# Altium PCB TK103_Multiplexer.PcbDoc
Units mm, origin at the board's own origin, x right, y up, seen from the top; angles counter-clockwise.
Board outline 100 x 10 mm, 2 copper layers (Top Layer, Bottom Layer); 9 components, 15 nets, 71 pads, 49 vias.
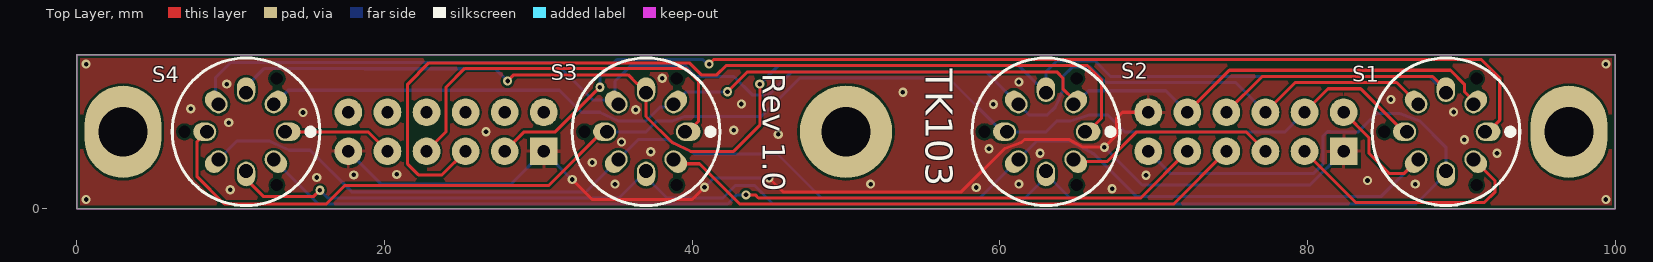
[diagram p0: Top Layer view]
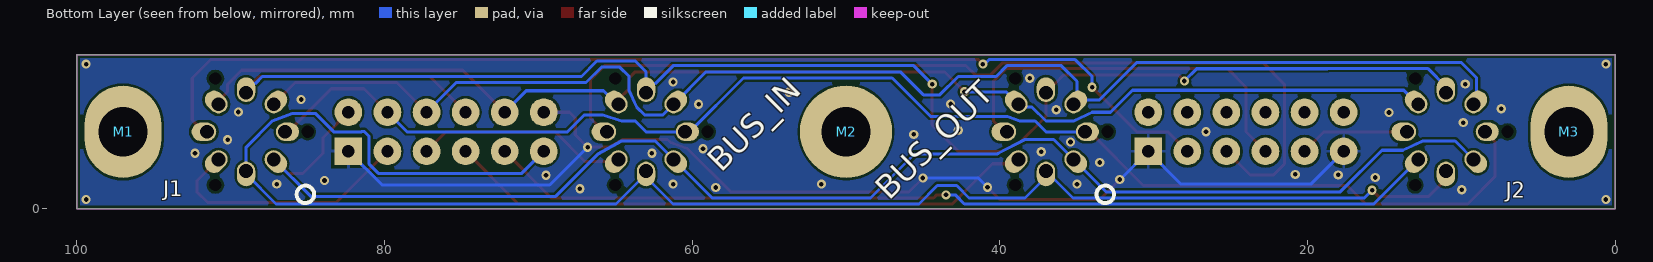
[diagram p1: Bottom Layer view, seen from below]
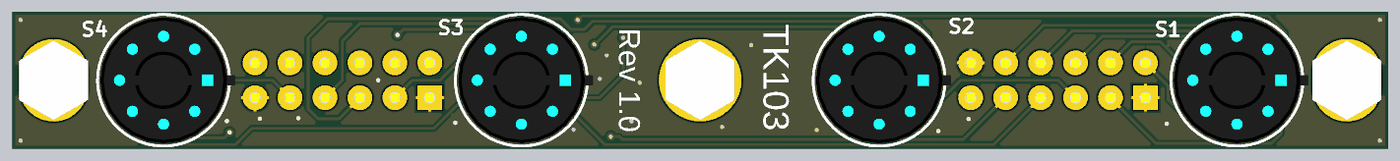
[diagram p2: 3D render of the assembled board from above, using the file's embedded part models]

## Layer stack, top to bottom
Top Solder: solder mask 0.0102, Solder Resist, Dk 3.5
Top Layer: signal copper 0.0356
Dielectric 1: dielectric 0.32, FR-4, Dk 4.8
Bottom Layer: signal copper 0.0356
Bottom Solder: solder mask 0.0102, Solder Resist, Dk 3.5

## Board outline
0,0 0,10 100,10 100,0

## Design rules (kind name [scope] priority, off if disabled: settings)
Clearance [All] p1: gap=0.16 ignorepadtopadclearanceinfootprint=FALSE except(0: Arc-Text Arc-Hole Track-Text Track-Hole SMDPad-Text SMDPad-Hole THPad-Text THPad-Hole Via-Text Via-Hole Fill-Text Fill-Hole Poly-Text Poly-Hole Region-Text Region-Hole Text-Text Text-Hole)
Height [All] p1: minheight=0 maxheight=200 prefheight=12.7
HoleSize [All] p1: absolutevalues=TRUE maxlimit=6.35 minlimit=0.3 maxpercent=80.000 minpercent=20.000
MinimumSolderMaskSliver [All] p1: minsoldermaskwidth=0.1
PlaneClearance [All] p1: clearance=1
PlaneConnect [All] p1: planeconnectstyle=Relief reliefexpansion=0.508 reliefentries=4 reliefconductorwidth=1 reliefairgap=0.254
PolygonConnect PolygonConnect_1 [IsVia] p1: connectstyle=Direct reliefconductorwidth=0.254 reliefentries=4 polygonreliefangle="90 Angle" airgapwidth=0.254
PolygonConnect [All] p2: connectstyle=Relief reliefconductorwidth=0.2 reliefentries=4 polygonreliefangle="90 Angle" airgapwidth=0.2
RoutingVias [All] p1: holewidth=0.3 width=0.6 viastyle="Through Hole" minholewidth=0.3 minwidth=0.6 maxholewidth=6.35 maxwidth=10
SilkToSolderMaskClearance [IsPad] p1: minsilkscreentomaskgap=0.178 clearancetoexposedcopper=TRUE
SolderMaskExpansion [All] p1: expansion=0.1
Width [All] p1: maxlimit=10 minlimit=0.16 preferedwidth=0.4
24 further rules are at their usual default settings.

## Components (designator, comment, footprint, x,y, rotation, side; value= is the part's Value field where it differs from the comment)
J1 "Header2x6" HDRV12W64P254_2X6_Shrouded 76,5 r90 bottom
J2 "Header2x6" HDRV12W64P254_2X6_Shrouded 24,5 r90 bottom
M1 "Avstandstykker" M3_Spacer_Inverted#1 97,5 r180 bottom
M2 "Avstandstykker" M3_Spacer_Inverted#2 50,5 r180 bottom
M3 "Avstandstykker" M3_Spacer_Inverted#1 3,5 r180 bottom
S1 "RM100772BCB" RM100772BCB 89,5 r270 top
S2 "RM100772BCB" RM100772BCB 63,5 r270 top
S3 "RM100772BCB" RM100772BCB 37,5 r270 top
S4 "RM100772BCB" RM100772BCB 11,5 r270 top

## Footprints (in the part's own frame and the unit in brackets; to place one, negate y for a bottom-side part, rotate by r counter-clockwise, add the part's x,y. Pads: shape width x height; smd on the part's side, far side on the other; paste and mask are expansions set on the pad)
HDRV12W64P254_2X6_Shrouded [mm] "Header 2x6 Shrouded"
  rect 1.8x1.8 hole 0.8: 1(-1.27,6.35)
  round 1.8 hole 0.8: 2(1.27,6.35) 3(-1.27,3.81) 4(1.27,3.81) 5(-1.27,1.27) 6(1.27,1.27) 7(-1.27,-1.27) 8(1.27,-1.27) 9(-1.27,-3.81) 10(1.27,-3.81) 11(-1.27,-6.35) 12(1.27,-6.35)
  silkscreen extent -4.63,8.58 -3.5,9.71, body extent -4.45,-9.53 4.83,9.52, height 8.89
M3_Spacer_Inverted#1 [mm]
  oval 5x6 hole 3.2 unplated: 0(0,0)
  body extent -2.5,-2.89 2.5,2.89, height 7.5
M3_Spacer_Inverted#2 [mm]
  round 6 hole 3.2 unplated: 0(0,0)
  body extent -2.5,-2.89 2.5,2.89, height 7.5
RM100772BCB [mm] "Rotary switch"
  round 0 hole 0.8 unplated: 0(-3.464,2) 0(0,-4) 0(3.464,2)
  oval 1.2x1.6 hole 0.9 copper offset 0,0.2: 0(0,2.54)
  oval 1.2x1.6 hole 0.9 copper offset 0.141,0.141 rot 135: 1(1.796,1.796)
  oval 1.6x1.2 hole 0.9 copper offset 0.2,0: 2(2.54,0)
  oval 1.2x1.6 hole 0.9 copper offset 0.141,-0.141 rot 45: 3(1.796,-1.796)
  oval 1.2x1.5 hole 0.9 copper offset 0,-0.15: 4(0,-2.54)
  oval 1.2x1.6 hole 0.9 copper offset -0.141,-0.141 rot 135: 5(-1.796,-1.796)
  oval 1.6x1.2 hole 0.9 copper offset -0.2,0: 6(-2.54,0)
  oval 1.2x1.6 hole 0.9 copper offset -0.141,0.141 rot 45: 7(-1.796,1.796)
  silkscreen extent -4.8,-4.8 4.8,4.8, body extent -4.6,-4.6 4.6,5.21, height 14.3

## Part data
J1 J2: library part 4650, beskrivelse="Header Shrouded", id=4650, navn="Header 2X6 Shrouded", nokkelord=Header, pakke_opprettet="2019-02-16 14:00:24", pakke_opprettet_av=815, pakketype=TH, pris=16, symbol_opprettet="2014-11-13 11:04:02", symbol_opprettet_av=815
M1 M2 M3: library part 1713, "M3 Hex Threaded Nylon Spacer", antall=300, dybde=0, hylle=5, id=1713, lager_type=Fremlager, leverandor=Farnell, leverandor_varenr=1733429, navn=Avstandstykker, pakke_opprettet="2019-02-17 15:22:28", pakke_opprettet_av=815, pakketype=-, pris=1, rad=2, rom=OV, symbol_opprettet="2019-02-17 15:24:27", symbol_opprettet_av=815
S1 S2 S3 S4: library part 4656, "SWITCH ROTARY 8POS 500MA 24V", id=4656, leverandor=DigiKey, leverandor_varenr=CKN10691-ND, navn=RM100772BCB, nokkelord=RM, pakke_opprettet="2019-02-17 14:24:57", pakke_opprettet_av=815, pakketype=TH, pris=25, produsent=C&K, symbol_opprettet="2019-02-17 14:24:21", symbol_opprettet_av=815

## Via types
v1: diameter 0.6, hole 0.3, Top Layer to Bottom Layer, tented both sides, 49 vias

## Nets (pads, with @x,y where several pads share a name; then routed paths per layer and width w, separated by ;. In a path a pad name is that pad's centre, name@x,y a point inside that pad or via, vN(x,y) a via of type N, cw(c..) or ccw(c..) an arc to the next point about the centre after c; other vN are vias at no path point)
GND: J1.1 J1.12 J2.1 J2.11 | length 76.5
  Top Layer w0.2: v1(32.2,1.9) 33.5,0.6 40,0.6 v1(40.8,1.4) ; v1(45,2) 45.9,1.1 57.5,1.1 60.3,3.9 61.4,4.3 61.6,4.5 64.5,4.5 65.4,4 v1(66.8,4) 67.6,4.8 67.6,5.9 67.97,6.27 J1.12
  Bottom Layer w0.2: J2.11 19.78,1.6 28.22,1.6 J2.1 32.18,1.9 v1(32.2,1.9) ; v1(40.8,1.4) 41.4,2 v1(45,2) ; v1(66.8,4) 69.264,1.536 80.156,1.536 J1.1
  other v1: 0.6,0.6 99.4,0.6 9.971,1.24 67.3,1.3 58.472,1.378 34.983,1.6 51.6,1.6 61.24,1.6 87.006,1.6 83.9,1.832 15.6,2.027 18,2.2 69.5,2.181 20.8,2.23 33.5,3.006 62.617,3.6 92.323,3.6 37.3,3.7 59.3,3.895 35.402,4.336 90.2,4.486 45.6,4.83 26.6,5 42.7,5.1 9.868,5.6 14.7,6.254 89.5,6.287 36.336,6.439 7.4,6.5 59.583,6.791 43.2,6.805 85.425,7.1 53.7,7.564 9.746,8.1 61.24,8.235 38.056,8.479 0.6,9.4 99.4,9.4
IN_0: J1.11 S1.2 S2.2 S3.2 S4.2 | length 109.8
  Top Layer w0.2: S4.2 11,1.91 12.11,0.8 15.4,0.8 v1(15.8,1.2)
  Bottom Layer w0.2: v1(15.8,1.2) 16.3,0.7 35.24,0.7 36.409,1.869 36.538,1.869 S3.2@37,2.331 ; S3.2 S3.2@37,2.331 ; S2.2 S2.2@63,2.26 ; J1.11 71.08,2.3 80.4,2.3 81,2.9 81,4.7 81.317,5.017 81.483,5.017 81.5,5 83.3,5 84.5,6.2 86,6.2 87.3,5.7 89,4 S1.2 89,2.26 87.05,0.31 64.95,0.31 S2.2@63,2.26 ; S3.2@37,2.331 37,2.06 38.36,0.7 42,0.7 42.808,1.508 44.061,1.508 45.259,0.31 61.25,0.31 63,2.06 S2.2@63,2.26
IN_1: J1.2 S1.3 S2.3 S3.3 S4.3 | length 93.9
  Top Layer w0.2: J1.2 84,4.62 84,3.6 85.3,2.3 86.3,2.3 S1.3
  Bottom Layer w0.2: S4.3 10.4,4.4 12.5,4.4 13.8,3.8 15.16,3.8 17.86,1.1 33.1,1.1 S3.3 36.5,4.5 38.36,4.5 40.1,3.6 40.14,3.56 45.544,3.56 48.404,0.7 58.7,0.7 S2.3 62.4,4.4 64.6,4.4 66.128,3.551 68.879,0.8 84.8,0.8 S1.3
IN_2: J1.4 S1.4 S2.4 S3.4 S4.4 | length 90.5
  Top Layer w0.2: S4.4 8.431,5 7.969,4.538 7.969,4.508 7.8,4.34 7.8,2.1 9.59,0.31 16.21,0.31 17.4,1.5 30.66,1.5 34.16,5 S3.4 ; J1.4 81.34,7.8 83.46,7.8 86.26,5 S1.4
  Bottom Layer w0.2: S3.4 37,5 37.7,5.7 38.7,5.7 39.5,6 44.5,6 47,8.5 56.66,8.5 60.16,5 S2.4 63,5 63.7,5.7 64.6,5.7 65.8,6.1 67,6.1 68.1,5 78.54,5 J1.4
IN_3: J1.6 S1.5 S2.5 S3.5 S4.5 | length 90.7
  Top Layer w0.2: J1.6 79.2,8.2 85.8,8.2 S1.5
  Bottom Layer w0.2: S4.5 9,7 9,8.5 10,9.5 31.1,9.5 33.521,7.079 34.921,7.079 S3.5@34.983,7.017 ; S3.5 S3.5@34.983,7.017 ; J1.6 75.34,8.2 66.9,8.2 65.9,9.2 64.7,9.2 64.1,8.6 64.1,7.7 63.6,6.6 63.1,6.1 61.9,6.1 S2.5 59.1,8.9 46.469,8.9 44.969,7.4 43.9,7.4 42.7,8.6 40.24,8.6 39.54,9.3 36,9.3 34.983,8.283 S3.5@34.983,7.017
IN_4: J1.8 S1.6 S2.6 S3.6 S4.6 | length 105.2
  Top Layer w0.2: v1(28,8.3) 28.4,8.7 35.84,8.7 36.409,8.131 36.538,8.131 37,7.669 S3.6 37,6 38.7,4.3 39.9,3.73 42.7,3.73 44.4,5.43 v1(44.4,8.1) ; J1.8 77.06,8.6 88.14,8.6 89,7.74 S1.6
  Bottom Layer w0.2: S4.6 11,7.94 12.184,9.124 18.676,9.124 18.7,9.1 27.2,9.1 v1(28,8.3) ; v1(44.4,8.1) 45.6,9.3 61.24,9.3 62.409,8.131 62.538,8.131 S2.6@63,7.669 ; S2.6 63,8.9 63.7,9.6 66.2,9.6 67.2,8.6 87.94,8.6 88.409,8.131 88.538,8.131 89,7.669 S1.6
IN_5: J1.10 S1.7 S2.7 S3.7 S4.7 | length 85.3
  Top Layer w0.2: v1(42.3,7.6) 43.6,8.9 63.7,8.9 64.1,8.5 64.1,7.8 64.796,7.104 S2.7 ; J1.10 74.92,9 89.3,9 90.2,8.1 90.2,7.614 90.796,7.018 S1.7
  Bottom Layer w0.2: S4.7 12.827,6.796 13.731,7.7 31.37,7.7 32.8,6.27 34,6.27 35.2,5.7 37,5.7 37.905,6.605 38.605,6.605 S3.7 39.6,7.6 v1(42.3,7.6) ; S2.7 64.888,6.796 65.761,7.669 70.791,7.669 J1.10
MIDI_CH1: J1.3 S1.1 | length 16.7
  Top Layer w0.2: J1.3 83.14,0.4 91.5,0.4 92.2,1.1 92.2,1.8 S1.1
MIDI_CH2: J1.5 S2.1 | length 13.9
  Top Layer w0.2: S2.1 64.937,3.063 66.963,3.063 68.9,5 76,5 J1.5
MIDI_CH3: J1.7 S3.1 | length 38.5
  Top Layer w0.2: S3.1 39.079,2.921 40.479,2.921 43.09,0.31 71.31,0.31 J1.7
MIDI_CH4: J1.9 S4.1 | length 62.2
  Top Layer w0.2: v1(43.5,0.9) 44.1,0.9 44.3,0.7 69.16,0.7 J1.9
  Bottom Layer w0.2: S4.1 15.69,0.31 42.31,0.31 42.9,0.9 v1(43.5,0.9)
OUT_0: J2.3 S1.0@91.54,5 | length 72.3
  Top Layer w0.2: J2.3 29.08,5 31.1,5 v1(34,7.9) ; v1(41.1,9.4) 41.39,9.69 91.31,9.69 92.5,8.5 92.5,5.76 91.74,5 S1.0@91.54,5
  Bottom Layer w0.2: v1(34,7.9) 34,8.59 35.1,9.69 40.702,9.69 40.992,9.4 v1(41.1,9.4)
OUT_1: J2.5 S2.0@65.54,5 | length 60.5
  Top Layer w0.2: J2.5 23.74,2.2 22.2,2.2 21.5,2.9 21.5,8.1 22.884,9.484 39.816,9.484 40.6,8.7 41.6,8.7 42.2,9.3 65.7,9.3 66.6,8.4 66.6,5.86 65.74,5 S2.0@65.54,5
OUT_2: J2.7 S3.0@39.54,5 | length 25.7
  Top Layer w0.2: J2.7 24,5 24,7.9 25.224,9.124 39.576,9.124 40.4,8.3 40.4,5.669 39.731,5 S3.0@39.54,5
OUT_3: J2.9 S4.0@13.54,5 | length 7.2
  Top Layer w0.2: S4.0@13.54,5 18.92,5 J2.9
pads on no net: J2.2 J2.4 J2.6 J2.8 J2.10 J2.12 M1.0 M2.0 M3.0 S1.0@85,5 S1.0@91,1.536 S1.0@91,8.464 S2.0@59,5 S2.0@65,1.536 S2.0@65,8.464 S3.0@33,5 S3.0@39,1.536 S3.0@39,8.464 S4.0@7,5 S4.0@13,1.536 S4.0@13,8.464

## Polygon pours and split planes (outlines as drawn)
GND on Top Layer "GND" (solid, pour order 0): 0.2,0 0.2,10 100,10 100,0
GND on Bottom Layer "GND" (solid, pour order 2): 0.2,0 0.2,10 100,10 100,0

## Keep-outs
Keep-Out Layer:
  the board outline again, w0.1

## Silkscreen, mask and mechanical layers (free items; w line width, h text height)
Top Overlay:
  text "TK103" at 54.6,9.1 h3 r270
  text "Rev 1.0" at 44.1,8.8 h2.5 r270
Bottom Overlay:
  text "BUS_IN" at 58.1,2.3 h1.52 r315
  text "BUS_OUT" at 47.2,0.5 h1.52 r315
Mechanical 1:
  the board outline again, w0.1